# Altium PCB STM32_BOARD_v1a.PcbDoc
Units mm, origin at the board's own origin, x right, y up, seen from the top; angles counter-clockwise.
Board outline 150 x 100 mm, 2 copper layers (Top Layer, Bottom Layer), stack 1.67 mm thick; 88 components, 89 nets, 374 pads, 326 vias.
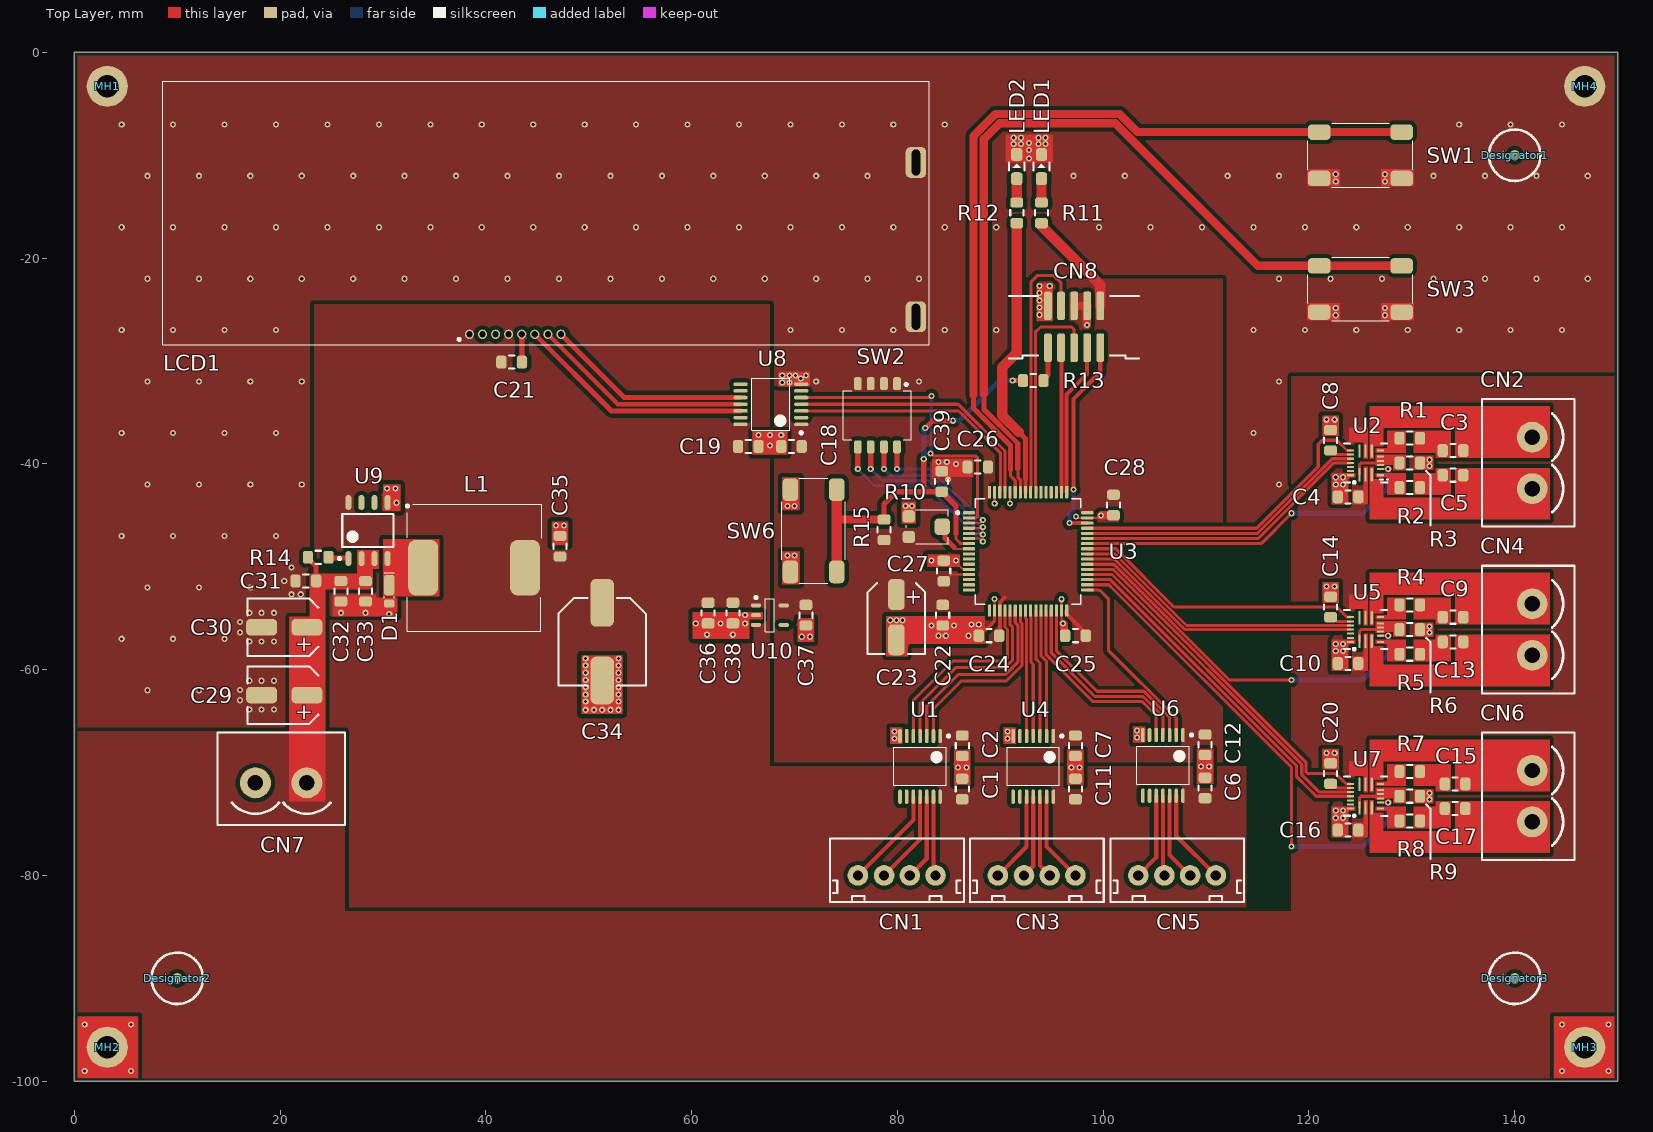
[diagram p0: Top Layer view]
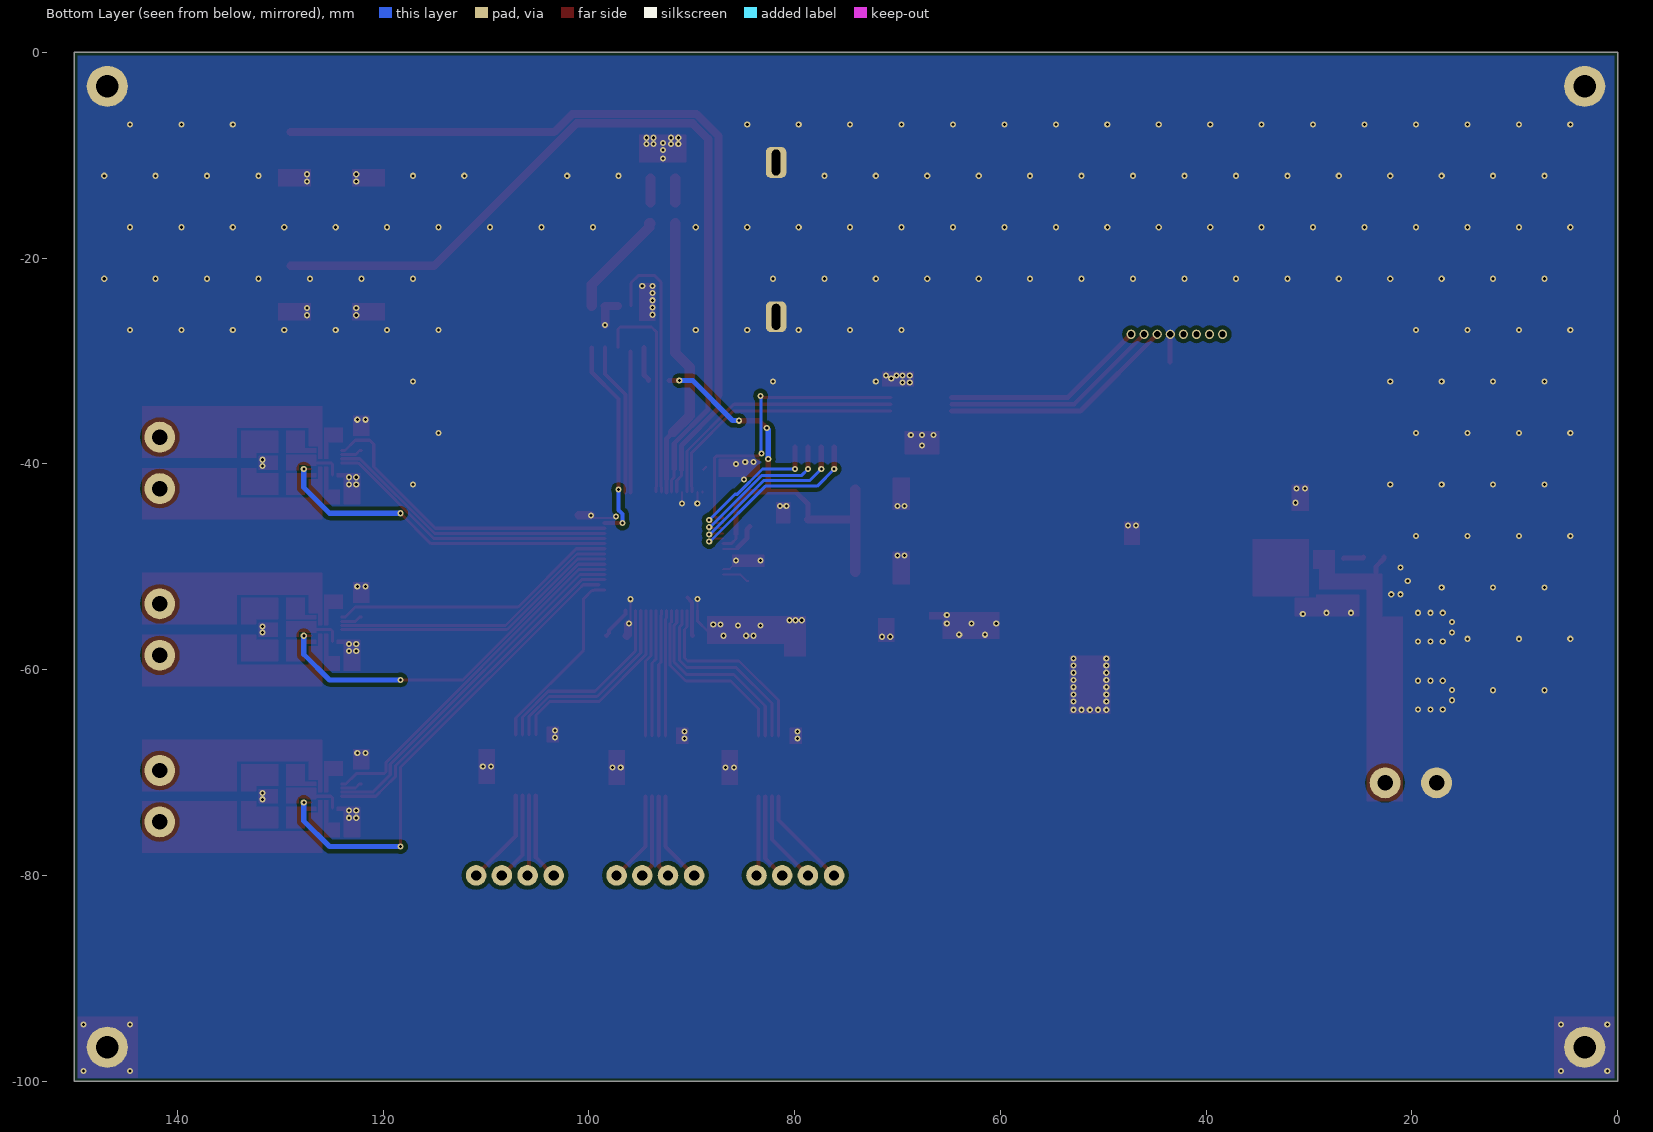
[diagram p1: Bottom Layer view, seen from below]
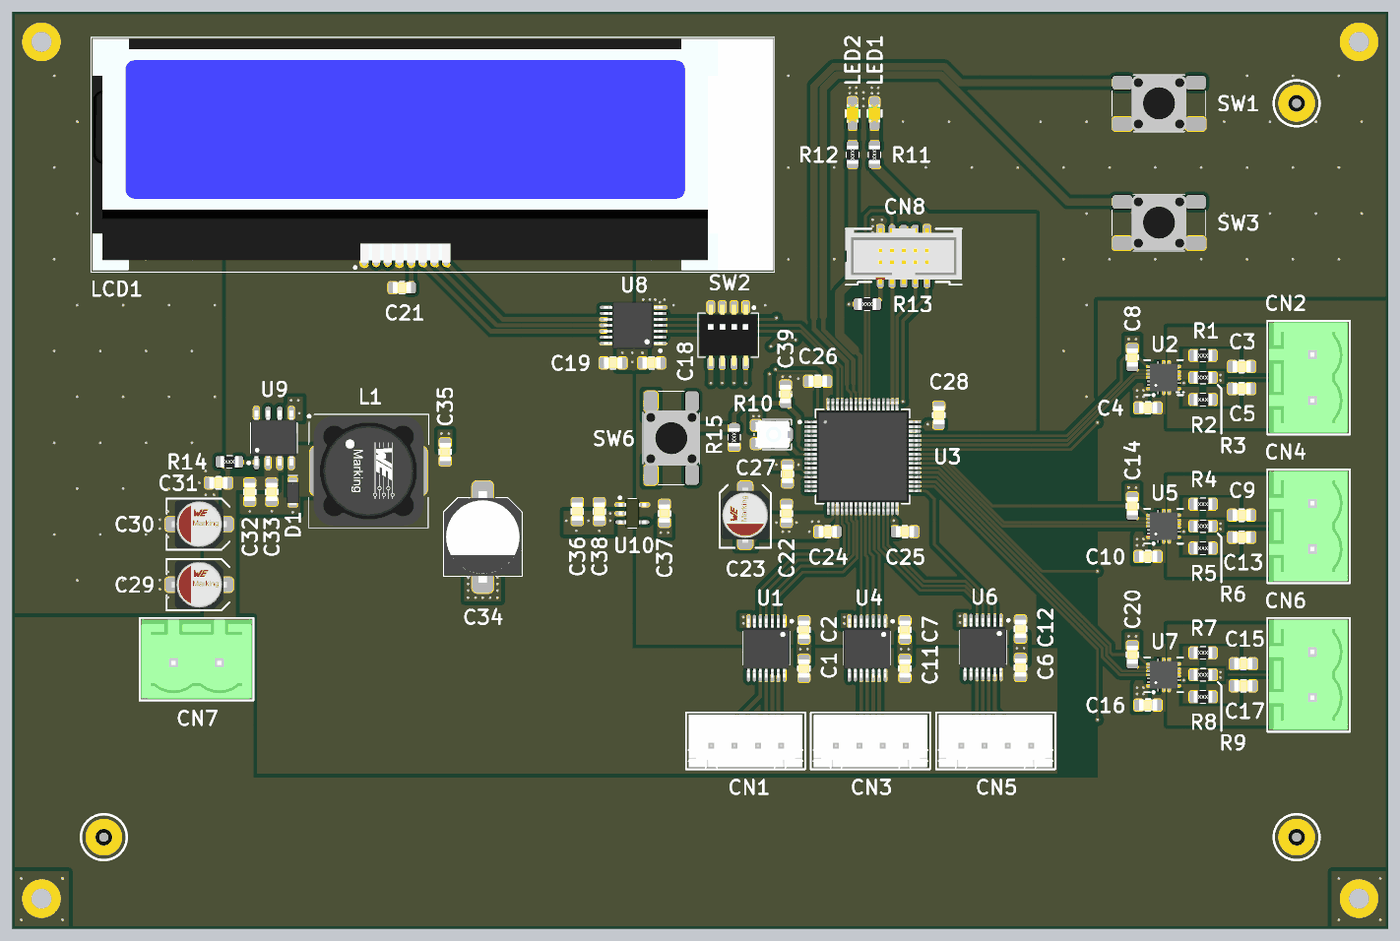
[diagram p2: 3D render of the assembled board from above, using the file's embedded part models]

## Layer stack, top to bottom
Top Solder: solder mask 0.0102, Solder Resist, Dk 3.5
Top Layer: signal copper 0.035
Dielectric 1: dielectric 1.6, FR-4, Dk 4.8
Bottom Layer: signal copper 0.035
Bottom Solder: solder mask 0.0102, Solder Resist, Dk 3.5

## Board outline
0,-100 0,0 150,0 150,-100

## Design rules (kind name [scope] priority, off if disabled: settings)
BoardOutlineClearance [All] p1: gap=0.3 ignorepadtopadclearanceinfootprint=FALSE
Clearance Clearance_poly [All vs InPolygon] p1: gap=0.4 ignorepadtopadclearanceinfootprint=TRUE
Clearance [All] p2: gap=0.1 ignorepadtopadclearanceinfootprint=TRUE
HoleSize [All] p1: absolutevalues=TRUE maxlimit=2.54 minlimit=0.3 maxpercent=80.000 minpercent=20.000
MinimumAnnularRing [All] p1: minimumring=0.15
PlaneClearance [All] p1: clearance=0.5
PlaneConnect [All] p1: planeconnectstyle=Direct reliefexpansion=0.508 reliefentries=4 reliefconductorwidth=0.254 reliefairgap=0.254
PolygonConnect [All] p1: connectstyle=Direct reliefconductorwidth=0.254 reliefentries=4 polygonreliefangle="90 Angle" airgapwidth=0.254
RoutingVias [All] p1: holewidth=0.3 width=0.6 viastyle="Through Hole" minholewidth=0.3 minwidth=0.6 maxholewidth=0.3 maxwidth=0.6
SolderMaskExpansion [All] p1: expansion=0.102 istentingtop=FALSE
Width [All] p1: maxlimit=5 minlimit=0.2 preferedwidth=0.5
27 further rules are at their usual default settings.

## Classes and differential pairs
component class STM32_BOARD_v1a_powerSupply: C22 C23 C24 C25 C26 C27 C28 C29 C30 C31 C32 C33 C34 C35 C36 C37 C38 CN7 D1 L1 L? MH1 MH2 MH3 MH4 R14 U9 U10
component class STM32_BOARD_v1a_main: C1 C2 C3 C4 C5 C6 C7 C8 C9 C10 C11 C12 C13 C14 C15 C16 C17 C18 C19 C20 C21 C39 CN1 CN2 CN3 CN4 CN5 CN6 CN8 L? LCD1 LED1 LED2 R1 R2 R3 R4 R5 R6 R7 R8 R9 R10 R11 R12 R13 R15 SW1 SW2 SW3 SW6 U1 U2 U3 U4 U5 U6 U7 U8

## Components (designator, comment, footprint, x,y, rotation, side; value= is the part's Value field where it differs from the comment)
C1 "100n" CAP_SMD 86.3,-71.6 r270 top
C2 "100n" CAP_SMD 86.3,-67.4 r90 top
C3 "10n" CAP_SMD 134,-38.7 r0 top
C4 "100n" CAP_SMD 123.8,-43.2 r0 top
C5 "10n" CAP_SMD 134,-41.1 r0 top
C6 "100n" CAP_SMD 109.9,-71.5 r270 top
C7 "100n" CAP_SMD 97.3,-67.4 r90 top
C8 "100n" CAP_SMD 122.1,-37.7 r270 top
C9 "10n" CAP_SMD 134,-54.9 r0 top
C10 "100n" CAP_SMD 123.8,-59.4 r0 top
C11 "100n" CAP_SMD 97.3,-71.6 r270 top
C12 "100n" CAP_SMD 109.9,-67.3 r90 top
C13 "10n" CAP_SMD 134,-57.3 r0 top
C14 "100n" CAP_SMD 122.1,-53.9 r270 top
C15 "10n" CAP_SMD 134.2,-71.1 r0 top
C16 "100n" CAP_SMD 123.8,-75.6 r0 top
C17 "10n" CAP_SMD 134.2,-73.5 r0 top
C18 "100n" CAP_SMD 69.7,-38.3 r0 top
C19 "100n" CAP_SMD 65.5,-38.3 r180 top
C20 "100n" CAP_SMD 122.1,-70.1 r270 top
C21 "100n" CAP_SMD 42.5,-30.1 r180 top
C22 "1u" CAP_SMD 84.4,-54.7 r90 top
C23 "4u7" 865230642008 79.9,-54.9 r270 top
C24 "100n" CAP_SMD 88.9,-56.7 r0 top
C25 "100n" CAP_SMD 97.3,-56.7 r0 top
C26 "100n" CAP_SMD 87.8,-40.3 r0 top
C27 "100n" CAP_SMD 84.5,-50.4 r270 top
C28 "100n" CAP_SMD 101,-44 r90 top
C29 "4u7" 865230642008 20.4,-62.475 r180 top
C30 "4u7" 865230642008 20.4,-55.875 r180 top
C31 "1u" CAP_SMD 22.5,-51.375 r0 top
C32 "100n" CAP_SMD 25.9,-52.375 r90 top
C33 "100n" CAP_SMD 28.3,-52.375 r90 top
C34 "330u" CAPAE10083X105M 51.3,-57.275 r270 top
C35 "100n" CAP_SMD 47.2,-48 r270 top
C36 "1u" CAP_SMD 61.6,-54.5 r90 top
C37 "100n" CAP_SMD 71.1,-54.7 r90 top
C38 "100n" CAP_SMD 64,-54.5 r90 top
C39 "100n" CAP_SMD 84.3,-41.7 r270 top
CN1 "JST XH 4" JST_XH_4-PIN 79.95,-80 r0 top
CN2 "PHOENIX_CONTACT_2x1_" 1755516 141.7,-39.9 r270 top
CN3 "JST XH 4" JST_XH_4-PIN 93.55,-80 r0 top
CN4 "PHOENIX_CONTACT_2x1_" 1755516 141.7,-56.1 r270 top
CN5 "JST XH 4" JST_XH_4-PIN 107.2,-80 r0 top
CN6 "PHOENIX_CONTACT_2x1_" 1755516 141.7,-72.3 r270 top
CN7 "PHOENIX_CONTACT_2x1_" 1755516 20.1,-71 r180 top
CN8 "SHF-105-01-L-D-SM" SHF-105-01-L-D-SM 97.17,-26.67 r270 top
D1 "SSS13HE" SOD-323HE 30.6,-52.675 r270 top
Designator1 "Comment" fid-2mm 140,-10 r0 top
Designator2 "Comment" fid-2mm 10,-90 r0 top
Designator3 "Comment" fid-2mm 140,-90 r0 top
L1 "150u" 744770215 38.85,-50.075 r270 top
LCD1 "MCCOG21605C6W-BNMLWI" MCCOG21605C6W-BNMLWI 38.4,-27.4 r0 top
LED1 "LED_SMD_GREEN" LED_0805_GREEN 94,-11.1 r90 top
LED2 "LED_SMD_GREEN" LED_0805_GREEN 91.6,-11.1 r90 top
MH1 "Mounting hole, non-plated, 2.2mm" MH-2mm2 3.2,-3.3 r0 top
MH2 "Mounting hole, non-plated, 2.2mm" MH-2mm2 3.2,-96.7 r0 top
MH3 "Mounting hole, non-plated, 2.2mm" MH-2mm2 146.8,-96.7 r0 top
MH4 "Mounting hole, non-plated, 2.2mm" MH-2mm2 146.8,-3.3 r0 top
R1 "100R" RES_0805 129.8,-37.5 r0 top
R2 "100R" RES_0805 129.8,-42.3 r0 top
R3 "200R" RES_0805 129.8,-39.9 r180 top
R4 "100R" RES_0805 129.8,-53.7 r0 top
R5 "100R" RES_0805 129.8,-58.5 r0 top
R6 "200R" RES_0805 129.8,-56.1 r180 top
R7 "100R" RES_0805 129.8,-69.9 r0 top
R8 "100R" RES_0805 129.8,-74.7 r0 top
R9 "200R" RES_0805 129.8,-72.3 r180 top
R10 "TC33X-2-502E" TC33X-2 82.9,-46.1 r270 top value=5k
R11 "200R" RES_0805 94,-15.6 r270 top
R12 "200R" RES_0805 91.6,-15.6 r270 top
R13 "0R" RES_0805 93.2,-31.9 r180 top
R14 "220R" RES_0805 23.7,-49.075 r0 top
R15 "10k" RES_0805 78.7,-46.4 r270 top
SW1 "PTS645SM43SMTR92LFS" Pushbutton_6x6mm 125,-10 r180 top
SW2 "A6H-4101" A6H-4101 78.053,-35.275 r270 top
SW3 "PTS645SM43SMTR92LFS" Pushbutton_6x6mm 125,-23 r180 top
SW6 "PTS645SM43SMTR92LFS" Pushbutton_6x6mm 71.85,-46.5 r270 top
U1 "Mfr Part Num." TSOP65P640X120-14N 82.2,-69.4 r270 top
U2 "MP6619GQ-P" MP6619GQ-P 125.5,-39.9 r90 top
U3 "32-bit Microcontroller" LQFP64_10x10mm 92.7,-48.5 r0 top
U4 "Mfr Part Num." TSOP65P640X120-14N 93.2,-69.4 r270 top
U5 "MP6619GQ-P" MP6619GQ-P 125.5,-56.1 r90 top
U6 "Mfr Part Num." TSOP65P640X120-14N 105.8,-69.3 r270 top
U7 "MP6619GQ-P" MP6619GQ-P 125.5,-72.3 r90 top
U8 "Mfr Part Num." TSOP65P640X120-14N 67.7,-34.2 r180 top
U9 "LT1107" SOIC127P600X175-8N 28.535,-46.475 r90 top
U10 "NCP164C" NCP164C_TSOP-5 67.6,-54.7 r0 top

## Footprints (in the part's own frame and the unit in brackets; to place one, negate y for a bottom-side part, rotate by r counter-clockwise, add the part's x,y. Pads: shape width x height; smd on the part's side, far side on the other; paste and mask are expansions set on the pad)
1755516 [mm] "Pin header, straight, Straight, 5mm Pitch, 2 Poles, Phoenix Contact"
  round 3 hole 1.5: 1(-2.5,0) 2(2.5,0)
  silkscreen extent -6.2,-4.9 6.2,4.1, body extent -6,-4.72 6,3.88, height 12
744770215 [mm]
  rrect50% 5.4x2.9 smd: 1(0,-4.95) 2(0,4.95)
  silkscreen extent -6.17,-6.58 6.2,6.58, body extent -6,-6 6,6, height 7.26
865230642008 [mm] "SMD Aluminium Electrolytic Capacitor, Radial Can - SMD, 4.7 µF, 50 V, 5000 hours @ 105°C, Polar"
  rrect50% 3x1.6 smd: 1(-2.2,0) 2(2.2,0)
  silkscreen extent -3.3,-2.79 3.56,2.79, body extent -3,-2.65 3,2.65, height 5.35
A6H-4101 [mm]
  rrect50% 1.25x0.76 smd paste+0 mask+0.1: 1(-3.075,1.905) 2(-3.075,0.635) 3(-3.075,-0.653) 4(-3.075,-1.905) 5(3.075,-1.905) 6(3.075,-0.653) 7(3.075,0.635) 8(3.075,1.905)
  silkscreen extent -3.1,-3.3 2.4,3.3, body extent -3.35,-3.16 3.35,3.15, height 1.55
CAP_SMD [mm] "MLCC Capacitor, 0508 Case Size"
  rrect50% 1x1.25 smd: 1(-1,0)
  rrect50% 1x1.25 smd paste+0: 2(1,0)
  silkscreen extent -0.25,-0.64 0.25,0.64, body extent -1,-0.62 1,0.62, height 0.6
CAPAE10083X105M [mm] "Aluminum Electrolytic Capacitor, Body 8.30x8.30x10.50mm, IPC Low Density"
  rrect50% 4.65x2.3 smd: 1(-3.775,0) 2(3.775,0)
  silkscreen extent -4.25,-4.25 4.25,4.25, body extent -5,-4.25 5,4.25, height 10.5
fid-2mm [mm]
  round 1 smd mask+1.5: 0(0,0)
  silkscreen extent -2.5,-2.5 2.5,2.5
JST_XH_4-PIN [mm] "JST XH 4 pin connector"
  round 2 hole 1: 1(3.75,0) 2(1.25,0) 3(-1.25,0) 4(-3.79,0)
  silkscreen extent -6.5,-2.6 6.5,3.6, body extent -6.2,-2.37 6.2,3.38, height 7
LED_0805_GREEN [mm] "Footprint for 0805 Case Size LED"
  rrect50% 1.25x1.1 smd: 1(-1.175,0) 2(1.175,0)
  silkscreen extent -0.38,-0.76 0.38,0.76, body extent -1,-0.62 1.01,0.63, height 0.8
LQFP64_10x10mm [mm] "10x10 mm"
  rrect50% 1.194x0.305 smd paste+0 mask+0.05: 1(-5.75,3.75) 2(-5.75,3.25) 3(-5.75,2.75) 4(-5.75,2.25) 5(-5.75,1.75) 6(-5.75,1.25) 7(-5.75,0.75) 8(-5.75,0.25) 9(-5.75,-0.25) 10(-5.75,-0.75) 11(-5.75,-1.25) 12(-5.75,-1.75) 13(-5.75,-2.25) 14(-5.75,-2.75) 15(-5.75,-3.25) 16(-5.75,-3.75) 33(5.75,-3.75) 34(5.75,-3.25) 35(5.75,-2.75) 36(5.75,-2.25) 37(5.75,-1.75) 38(5.75,-1.25) 39(5.75,-0.75) 40(5.75,-0.25) 41(5.75,0.25) 42(5.75,0.75) 43(5.75,1.25) 44(5.75,1.75) 45(5.75,2.25) 46(5.75,2.75) 47(5.75,3.25) 48(5.75,3.75)
  rrect50% 0.305x1.194 smd paste+0 mask+0.05: 17(-3.75,-5.75) 18(-3.25,-5.75) 19(-2.75,-5.75) 20(-2.25,-5.75) 21(-1.75,-5.75) 22(-1.25,-5.75) 23(-0.75,-5.75) 24(-0.25,-5.75) 25(0.25,-5.75) 26(0.75,-5.75) 27(1.25,-5.75) 28(1.75,-5.75) 29(2.25,-5.75) 30(2.75,-5.75) 31(3.25,-5.75) 32(3.75,-5.75) 49(3.75,5.75) 50(3.25,5.75) 51(2.75,5.75) 52(2.25,5.75) 53(1.75,5.75) 54(1.25,5.75) 55(0.75,5.75) 56(0.25,5.75) 57(-0.25,5.75) 58(-0.75,5.75) 59(-1.25,5.75) 60(-1.75,5.75) 61(-2.25,5.75) 62(-2.75,5.75) 63(-3.25,5.75) 64(-3.75,5.75)
  silkscreen extent -6.95,-5.13 5.13,5.13, body extent -6,-6 6,6, height 1.6
MCCOG21605C6W-BNMLWI [mm]
  round 0.9 hole 0.6: 1(0,0) 2(1.27,0) 3(2.54,0) 4(3.81,0) 5(5.08,0) 6(6.35,0) 7(7.62,0) 8(8.89,0)
  rrect50% 2x3 hole 0.8 slot 2.5 at 90 deg: G1(43.4,1.7) G2(43.4,16.7)
  silkscreen extent -29.8,-1 44.7,24.6, body extent -29.66,-0.8 44.56,24.41, height 6.3
MH-2mm2 [mm] "2.2mm Mounting hole, non plated"
  round 4 hole 2.2 unplated: 1(0,0)
MP6619GQ-P [mm] "19-pin, QFN-19_3x3mm"
  rrect50% 1.3x0.2 smd: 1(-1.15,0.6) 2(-1.15,0) 3(-1.15,-0.6) 10(1.15,-0.6) 11(1.15,0) 12(1.15,0.6)
  rrect50% 0.2x0.7 smd: 4(-1.2,-1.45) 5(-0.6,-1.45) 6(-0.2,-1.45) 7(0.2,-1.45) 8(0.6,-1.45) 9(1.2,-1.45) 13(1.2,1.45) 14(0.8,1.45) 15(0.4,1.45) 16(0,1.45) 17(-0.4,1.45) 18(-0.8,1.45) 19(-1.2,1.45)
  silkscreen extent -2,-2.11 1.9,2.1, body extent -1.5,-1.5 1.5,1.5, height 0.92
NCP164C_TSOP-5 [mm] "TSOP, 6-Leads, Body 3.00x1.50mm, Pitch 0.95mm, IPC Medium Density"
  oval 1x0.4 smd: 1(-1.35,0.95) 2(-1.35,0) 3(-1.35,-0.95) 4(1.35,-0.95) 5(1.35,0.95)
  silkscreen extent -1.47,-1.6 0.45,1.82, body extent -1.5,-1.55 1.5,1.55, height 1.1
Pushbutton_6x6mm [mm] "Tactile Switch"
  rrect50% 2.2x1.5 smd: 1(-4,2.25) 2(4,2.25) 3(-4,-2.25) 4(4,-2.25)
  silkscreen extent -5.1,-3.1 5.1,3.1, body extent -5,-3 5,3
RES_0805 [mm] "SMD Resistor, 0805 Case Size"
  rrect50% 1x1.25 smd: 1(-1,0)
  rrect50% 1x1.25 smd paste+0: 2(1,0)
  silkscreen extent -0.25,-0.64 0.25,0.64, body extent -1,-0.62 1,0.62, height 0.5
SHF-105-01-L-D-SM [mm]
  rrect50% 2.79x0.74 smd: 1(-2.03,2.54) 2(2.03,2.54) 3(-2.03,1.27) 4(2.03,1.27) 5(-2.03,0) 6(2.03,0) 7(-2.03,-1.27) 8(2.03,-1.27) 9(-2.03,-2.54) 10(2.03,-2.54)
  silkscreen extent -3,-6.3 3.1,6.3, body extent -3.05,-6.35 3.05,6.35, height 5.33
SOD-323HE [mm]
  rrect50% 2x1 smd: 1(-0.9,0)
  rrect50% 0.8x1 smd: 2(0.9,0)
  silkscreen extent -2.1,-0.5 0.4,0.5, body extent -1.6,-0.7 1.1,0.7, height 0.76
SOIC127P600X175-8N [mm] "SOIC, 8-Leads, Body 4.90x3.90mm, Pitch 1.27mm, IPC Medium Density"
  oval 1.45x0.6 smd: 1(-2.725,1.905) 2(-2.725,0.635) 3(-2.725,-0.635) 4(-2.725,-1.905) 5(2.725,-1.905) 6(2.725,-0.635) 7(2.725,0.635) 8(2.725,1.905)
  silkscreen extent -2.85,-2.5 1.6,2.88, body extent -3,-2.5 3,2.5, height 1.75
TC33X-2 [mm]
  rrect50% 1.2x1.2 smd: 1(-1,-1.8) 3(1,-1.8)
  rrect50% 1.6x1.5 smd: 2(0,1.45)
  silkscreen extent -1.65,-2.03 1.65,2.03, body extent -1.5,-1.9 1.5,1.9, height 1.21
TSOP65P640X120-14N [mm] "TSOP, 14-Leads, Body 5.00x4.40mm, Pitch 0.65mm, IPC Medium Density"
  oval 1.4x0.35 smd mask+0.07: 1(-2.95,1.95) 2(-2.95,1.3) 3(-2.95,0.65) 4(-2.95,0) 5(-2.95,-0.65) 6(-2.95,-1.3) 7(-2.95,-1.95) 8(2.95,-1.95) 9(2.95,-1.3) 10(2.95,-0.65) 11(2.95,0) 12(2.95,0.65) 13(2.95,1.3) 14(2.95,1.95)
  silkscreen extent -3.07,-2.55 1.85,2.9, body extent -3.2,-2.55 3.2,2.55, height 1.2

## Part data
C1 C2 C3 C4 C5 C6 C7 C8 C9 C10 C11 C12 C13 C14 C15 C16 C17 C18 C19 C20 C21 C22 C24 C25 C26 C27 C28 C31 C32 C33 C35 C36 C37 C38 C39: library part C, Temperature Range=-55~125°C
  C1 C2 C4 C6 C7 C8 C10 C11 C12 C14 C16 C18 C19 C20 C21 C24 C25 C26 C27 C28 C32 C33 C35 C37 C38 C39: Capacitance=100n
  C3 C5 C9 C13 C15 C17: Capacitance=10n
  C22 C31 C36: Capacitance=1u
C23 C29 C30: library part CAP_POLAR_4u7_50V, "SMD Aluminium Electrolytic Capacitor, Radial Can - SMD, 4.7 µF, 50 V, 5000 hours @ 105°C, Polar", Manufacturer="Wurth Elektrinik", Mfr Part Num=865230642008, Voltage=50V
C34: library part CAP_POLAR_330u_50V, "SMD Aluminium Electrolytic Capacitor, Radial Can - SMD, 4.7 µF, 50 V, 5000 hours @ 105°C, Polar", Manufacturer=Kemet, Mfr Part Num=EDK337M010A9MAA, Voltage=10V
CN1 CN3 CN5: library part JST_XH_4_PIN, "JST XH 4 Pin Connector", Manufacturer=JASO, Mfr Part Num.="JST XH 4"
CN2 CN4 CN6 CN7: "Pin header, straight, Straight, 5mm Pitch, 2 Poles, Phoenix Contact", Manufacturer="Phoenix Contact", Mfr Part Num.=1755516
CN8: "Pin Header, Vertical, Wire-to-Board, 1.27 mm, 2 Rows, 10 Contacts, Surface Mount, SHF", Manufacturer=Samtec, Mfr. Part Number=SHF-105-01-L-D-SM
D1: library part SS13HE, "Surface Mount Schottky Barrier Rectifier.", Forward Current=1A, Forward Surge Current Max=25A, Forward Voltage Max.=550mV, Manufacturer="ON Semiconductor", Operating Temperature=150°C, Mfr Part Num.=SSS13HE
L1: library part L_105uH_744770215, "Power Inductor (SMD), 150 µH, 1.8 A, Shielded, 1.8 A, WE-PD, 12mm x 12mm x 8mm", DC Resistance Max=0.28R, Manufacturer="Wurth Elektronik", Mfr Part Num.=744770215, RMS Current=1.8A, Inductance=150u
LCD1: "Alphanumeric LCD, 16 x 2, White on Blue, 3V to 5V, I2C, English, Japanese, Transmissive", Manufacturer=MIDAS, Mfr Part Num.=MCCOG21605C6W-BNMLWI
MH1 MH2 MH3 MH4: library part MH-2mm2
R1 R2 R3 R4 R5 R6 R7 R8 R9 R11 R12 R13 R14 R15: library part R
  R1 R2 R4 R5 R7 R8: Resistance=100R
  R3 R6 R9 R11 R12: Resistance=200R
  R13: Resistance=0R
  R14: Resistance=220R
  R15: Resistance=10k
R10: "Trimpot, Single Turn, Cermet, Top Adjust, 5 kohm, Surface Mount, 1 Turns", Manufacturer=Bourns, Power Rating=100mW, Mfr Part Num.=TC33X-2-502E
SW1 SW3 SW6: "Tactile Switch, PT645, Top Actuated, Surface Mount, Round Button, 160 gf, 50mA at 12VDC", Current=50mA, Manufacturer="C&K Components", Voltage=12V, Mfr Part Num.=PTS645SM43SMTR92LFS
SW2: "DIP / SIP Switch, 4 Circuits, Slide, Surface Mount, SPST, 24 VDC, 25 mA", Current=25mA, Manufacturer=Omron, Voltage=24V, Mfr Part Num.=A6H-4101
U1 U4 U6 U8: library part TXS0104E, "Voltage Level Translator, 4 Input, 50 mA, 4.6 ns, 1.65 V to 5.5 V, TSSOP-14", Manufacturer="Texas Instruments", Mfr Part Num=TXS0104EPWR, Output Current=50mA, Supply Voltage=1.65V~5.5V
U2 U5 U7: "H-Bridge Motor driver", Manufacturer=MPS, Output Current=5A, Supply Voltage=5.4V~28V, Mfr Part Num=MP6619GQ-P
U3: library part STM32L476RGT3, "STM32 Arm-based 32-bit Microcontroller", Manufacturer=STMicroelectronics, Supply Voltage=1.7V~3.6V, Temperature Range=-40~125°C, CPU Speed=80MHz, Mfr Part Num=STM32L476RGT3, Program Memory Size=1MB, RAM Memory Size=128kB
U9: "Micropower / DC/DC Converter / Adjustable and Fixed 5V, 12V", Manufacturer="Linear technology", Mfr Part Num.=LT1107
U10: "LDO Regulator, 300mA, / Low Dropout Voltage, Ultra Low Noise, High PSRR with Power Good", Current=300mA, Input Voltage=1.6V~5V, Manufacturer="On Semiconductor", Mfr Part Num.=NCP164CSN330T1G, Output Voltage=3.3V

## Via types
v1: diameter 0.6, hole 0.3, Top Layer to Bottom Layer, tented both sides, 326 vias

## Nets (pads, with @x,y where several pads share a name; then routed paths per layer and width w, separated by ;. In a path a pad name is that pad's centre, name@x,y a point inside that pad or via, vN(x,y) a via of type N, cw(c..) or ccw(c..) an arc to the next point about the centre after c; other vN are vias at no path point)
+3V3: C2.2 C7.2 C12.2 C18.2 C22.2 C23.1 C24.2 C25.2 C26.2 C27.2 C28.2 C37.2 CN8.1 R10.3 R11.2 R15.2 U1.1 U3.13 U3.19 U3.32 U3.48 U3.64 U4.1 U6.1 U8.1 U10.5 | length 20.7
  Top Layer w0.2: C27.2 84.625,-51.4 85.275,-50.75 U3.13
  Top Layer w0.3: C26.2@88.6,-40.3 C26.2@88.848,-40.548 ; U3.64@88.948,-42.748 U3.64
  Top Layer w0.4: C24.2 89.95,-56.65 89.95,-53.45 90.4,-53 ; U3.32 96.45,-54.599 98.031,-56.18 98.031,-56.431 C25.2
  Top Layer w1: R11.2 94.125,-16.6 94.125,-17.001 99.124,-22 99.71,-22.586 CN8.1
+5V: C1.2 C6.2 C11.2 C19.2 C21.2 C34.1 C35.2 C36.2 C38.2 L1.2 LCD1.1 LCD1.4 U1.14 U4.14 U6.14 U8.14 U9.8 U10.1 U10.3
+24V: C4.2 C10.2 C16.2 C29.1 C30.1 C31.2 C32.2 C33.2 CN7.1 R14.1 U2.2 U2.11 U5.2 U5.11 U7.2 U7.11 U9.2 U9.3 | length 2.6
  Top Layer w0.5: R14.1 22.7,-49.2 23.5,-50 C31.2
A0: R10.2 U3.8 | length 4
  Top Layer w0.2: 85.5,-48.1 85.65,-48.25 U3.8
  Top Layer w0.5: R10.2 84.62,-46.37 84.62,-47.22 85.5,-48.1
Dip1: SW2.8 U3.3 | length 14
  Top Layer w0.2: U3.3 87.993,-45.75 88.293,-45.45 v1(88.3,-45.45)
  Top Layer w0.5: v1(79.958,-40.5) SW2.8
  Bottom Layer w0.3: v1(79.958,-40.5) 83.122,-40.5 85.568,-42.946 85.796,-42.946 v1(88.3,-45.45)
Dip2: SW2.7 U3.4 | length 15.5
  Top Layer w0.2: U3.4 88.2,-46.25 v1(88.3,-46.15)
  Top Layer w0.5: v1(78.688,-40.5) SW2.7
  Bottom Layer w0.3: v1(78.688,-40.5) 79.299,-41.111 83.168,-41.111 85.659,-43.602 85.674,-43.602 88.222,-46.15 v1(88.3,-46.15)
Dip3: SW2.6 U3.5 | length 17.1
  Top Layer w0.2: U3.5 88.2,-46.75 v1(88.3,-46.85)
  Top Layer w0.5: v1(77.4,-40.5) SW2.6
  Bottom Layer w0.3: v1(77.4,-40.5) 78.5,-41.6 82.972,-41.6 88.222,-46.85 v1(88.3,-46.85)
Dip4: SW2.5 U3.6 | length 18.7
  Top Layer w0.2: U3.6 87.993,-47.25 88.293,-47.55 v1(88.3,-47.55)
  Top Layer w0.5: v1(76.148,-40.5) SW2.5
  Bottom Layer w0.3: v1(76.148,-40.5) 77.809,-42.161 82.833,-42.161 88.222,-47.55 v1(88.3,-47.55)
ENC1_A: U1.2 U3.23 | length 18.4
  Top Layer w0.3: U1.2 83.5,-63.8 86.2,-61.1 90.571,-61.1 92.1,-59.571 92.1,-55.517 91.95,-55.367 U3.23
ENC1_B: U1.4 U3.21 | length 18.8
  Top Layer w0.3: U1.4 82.2,-63.262 85.662,-59.8 90.457,-59.8 91.2,-59.057 91.2,-55.89 90.95,-55.64 U3.21
ENC1_~A: U1.3 U3.22 | length 18.7
  Top Layer w0.3: U1.3 82.85,-63.531 85.931,-60.45 90.514,-60.45 91.7,-59.264 91.7,-55.683 91.45,-55.433 U3.22
ENC1_~B: U1.5 U3.20 | length 19
  Top Layer w0.3: U1.5 81.55,-62.992 85.392,-59.15 90.4,-59.15 90.7,-58.85 90.7,-56.097 90.45,-55.847 U3.20
ENC2_A: U3.27 U4.2 | length 12.4
  Top Layer w0.3: U3.27 93.95,-58.65 94.5,-59.2 U4.2
ENC2_B: U3.25 U4.4 | length 12.3
  Top Layer w0.3: U3.25 92.95,-54.694 93,-54.744 93,-59.3 93.2,-59.5 U4.4
ENC2_~A: U3.26 U4.3 | length 12.4
  Top Layer w0.3: U3.26 93.45,-58.95 93.85,-59.35 U4.3
ENC2_~B: U3.24 U4.5 | length 12.2
  Top Layer w0.3: U3.24 92.45,-54.997 92.55,-55.097 U4.5
ENC3_A: U3.33 U6.2 | length 18.4
  Top Layer w0.3: U3.33 98.894,-52.25 98.897,-52.252 99.497,-52.252 99.544,-52.3 99.7,-52.3 100.5,-53.1 100.5,-58.103 107.1,-64.703 U6.2
ENC3_B: U3.29 U6.4 | length 19.3
  Top Layer w0.3: U3.29 94.95,-58.357 99.193,-62.6 103.866,-62.6 105.8,-64.534 U6.4
ENC3_~A: U3.30 U6.3 | length 19.3
  Top Layer w0.3: U3.30 95.45,-58.15 99.4,-62.1 103.931,-62.1 106.45,-64.619 U6.3
ENC3_~B: U3.28 U6.5 | length 19.4
  Top Layer w0.3: U3.28 94.45,-58.564 98.986,-63.1 103.8,-63.1 105.15,-64.45 U6.5
GND: C1.1 C2.1 C4.1 C6.1 C7.1 C8.1 C10.1 C11.1 C12.1 C14.1 C16.1 C18.1 C19.1 C20.1 C21.1 C22.1 C23.2 C24.1 C25.1 C26.1 C27.1 C28.1 C29.2 C30.2 C31.1 C32.1 C33.1 C34.2 C35.1 C36.1 C37.1 C38.1 C39.1 CN7.2 CN8.3 CN8.5 CN8.9 D1.2 LCD1.5 LCD1.G1 LCD1.G2 LED1.2 LED2.2 MH1.1 MH2.1 MH3.1 MH4.1 R3.1 R6.1 R9.1 R10.1 SW1.1 SW1.2 SW2.1 SW2.2 SW2.3 SW2.4 SW3.1 SW3.2 SW6.3 SW6.4 U1.7 U2.19 U3.12 U3.18 U3.31 U3.47 U3.60 U3.63 U4.7 U5.19 U6.7 U7.19 U8.7 U9.5 U10.2 | length 22.9
  Top Layer w0.2: v1(85.7,-49.4) 85.7,-49.6 86.298,-50.198 86.898,-50.198 U3.12 ; v1(89.436,-53.141) 89.443,-53.149 89.443,-54.243 U3.18 ; v1(89.45,-43.85) U3.63 ; v1(90.95,-43.85) U3.60 ; v1(95.95,-53.15) U3.31 95.95,-55.242 96.1,-55.392 v1(96.1,-55.5) ; v1(97.348,-45.117) 97.456,-45.117 97.589,-45.25 U3.47 99.55,-45.25 v1(99.8,-45)
  Top Layer w0.3: C24.1 87.9,-56.629 88.242,-56.287 88.413,-56.287 89.452,-55.248 89.452,-54.252 U3.18
  Top Layer w0.5: LCD1.5 43.5,-27.42 C21.1 ; v1(84.9,-41.5) 84.9,-40.855 85.385,-40.37
  Top Layer w0.8: v1(96.1,-55.5) 96.2,-55.6 96.2,-56.6 C25.1 ; CN8.5 CN8.3 98.41,-24.67 v1(98.41,-26.5) ; v1(99.8,-45) C28.1
  other v1: 1,-99 5.5,-99 144.6,-99 149.1,-99 1,-94.5 5.5,-94.5 144.6,-94.5 149.1,-94.5 122.6,-74.4 123.3,-74.4 122.6,-73.7 123.3,-73.7 131.7,-72.6 131.7,-72 85.9,-69.5 86.7,-69.5 96.9,-69.5 97.7,-69.5 109.5,-69.4 110.3,-69.4 121.7,-68.1 122.5,-68.1 79.7,-66.7 90.7,-66.7 103.3,-66.6 79.7,-66 90.7,-66 103.3,-65.9 49.7,-63.9 50.5,-63.9 51.3,-63.9 52.1,-63.9 52.9,-63.9 17,-63.875 18.2,-63.875 19.4,-63.875 49.7,-63.1 52.9,-63.1 16.1,-62.975 49.7,-62.4 52.9,-62.4 7.1,-62 12.1,-62 16.1,-61.975 49.7,-61.7 52.9,-61.7 17,-61.075 18.2,-61.075 19.4,-61.075 49.7,-61 52.9,-61 49.7,-60.3 52.9,-60.3 49.7,-59.6 52.9,-59.6 49.7,-58.9 52.9,-58.9 122.6,-58.2 123.3,-58.2 122.6,-57.5 123.3,-57.5 17,-57.275 18.2,-57.275 19.4,-57.275 4.6,-57 9.6,-57 14.6,-57 70.7,-56.8 71.5,-56.8 84,-56.7 84.7,-56.7 86.9,-56.7 61.5,-56.6 64,-56.6 131.7,-56.4 16.1,-56.375 131.7,-55.8 83.3,-55.7 85.5,-55.7 87.2,-55.6 87.9,-55.6 60.4,-55.5 62.8,-55.5 65.2,-55.5 16.1,-55.375 79.3,-55.2 79.9,-55.2 80.5,-55.2 65.2,-54.7 30.6,-54.575 17,-54.475 18.2,-54.475 19.4,-54.475 25.9,-54.475 28.3,-54.475 21.1,-52.675 22,-52.675 7.1,-52 12.1,-52 17.1,-52 121.7,-51.9 122.5,-51.9 20.4,-51.375 21.1,-50.075 83.3,-49.4 69.3,-48.9 70,-48.9 4.6,-47 9.6,-47 14.6,-47 19.6,-47 46.8,-46 47.6,-46 69.3,-44.1 70,-44.1 80.8,-44.1 81.4,-44.1 31.3,-43.775 30.4,-42.375 31.2,-42.375 7.1,-42 12.1,-42 17.1,-42 22.1,-42 117.1,-42 122.6,-42 123.3,-42 122.6,-41.3 123.3,-41.3 131.7,-40.2 85.7,-40 84,-39.8 84.8,-39.8 131.7,-39.6 67.6,-38.2 66.5,-37.2 67.6,-37.2 68.7,-37.2 4.6,-37 9.6,-37 14.6,-37 19.6,-37 114.6,-37 121.7,-35.7 122.5,-35.7 68.8,-32.1 69.5,-32.1 7.1,-32 12.1,-32 17.1,-32 22.1,-32 72.1,-32 82.1,-32 117.1,-32 70.6,-31.7 68.8,-31.4 69.5,-31.4 70.1,-31.4 71.1,-31.4 4.6,-27 9.6,-27 14.6,-27 19.6,-27 69.6,-27 74.6,-27 79.6,-27 84.6,-27 89.6,-27 114.6,-27 119.6,-27 124.6,-27 129.6,-27 134.6,-27 139.6,-27 144.6,-27 122.6,-25.55 127.4,-25.55 93.8,-25.5 122.6,-24.85 127.4,-24.85 93.8,-24.8 93.8,-24.1 93.8,-23.4 93.8,-22.7 94.8,-22.7 7.1,-22 12.1,-22 17.1,-22 22.1,-22 27.1,-22 32.1,-22 37.1,-22 42.1,-22 47.1,-22 52.1,-22 57.1,-22 62.1,-22 67.1,-22 72.1,-22 77.1,-22 82.1,-22 117.1,-22 122.1,-22 127.1,-22 132.1,-22 137.1,-22 142.1,-22 147.1,-22 4.6,-17 9.6,-17 14.6,-17 19.6,-17 24.6,-17 29.6,-17 34.6,-17 39.6,-17 44.6,-17 49.6,-17 54.6,-17 59.6,-17 64.6,-17 69.6,-17 74.6,-17 79.6,-17 84.6,-17 89.6,-17 99.6,-17 104.6,-17 109.6,-17 114.6,-17 119.6,-17 124.6,-17 129.6,-17 134.6,-17 139.6,-17 144.6,-17 122.6,-12.55 127.4,-12.55 7.1,-12 12.1,-12 17.1,-12 22.1,-12 27.1,-12 32.1,-12 37.1,-12 42.1,-12 47.1,-12 52.1,-12 57.1,-12 62.1,-12 67.1,-12 72.1,-12 77.1,-12 97.1,-12 102.1,-12 112.1,-12 117.1,-12 132.1,-12 137.1,-12 142.1,-12 147.1,-12 122.6,-11.85 127.4,-11.85 92.8,-10.3 92.8,-9.5 91.3,-8.9 92,-8.9 93.7,-8.9 94.4,-8.9 92.8,-8.8 91.3,-8.3 92,-8.3 93.7,-8.3 94.4,-8.3 4.6,-7 9.6,-7 14.6,-7 19.6,-7 24.6,-7 29.6,-7 34.6,-7 39.6,-7 44.6,-7 49.6,-7 54.6,-7 59.6,-7 64.6,-7 69.6,-7 74.6,-7 79.6,-7 84.6,-7 134.6,-7 139.6,-7 144.6,-7
JTCK-SWCLK: CN8.4 U3.49 | length 14.9
  Top Layer w0.4: U3.49 96.45,-33.25 98.44,-31.26 CN8.4
JTDI: CN8.8 U3.50 | length 13.7
  Top Layer w0.4: U3.50 CN8.8@95.95,-29.1
JTDO-TRACESWO: CN8.6 U3.55 | length 21.4
  Top Layer w0.3: U3.55 93.45,-42.306 93.4,-42.256 93.4,-27.2 93.9,-26.7 96.936,-26.7 97.17,-26.934 CN8.6
JTMS-SWDIO: CN8.2 U3.46 | length 20
  Top Layer w0.4: v1(96.736,-45.75) U3.46 ; v1(97.1,-42.5) 97.1,-33.7 99.71,-31.09 CN8.2
  Bottom Layer w0.4: v1(96.736,-45.75) 96.736,-44.864 97.1,-44.5 v1(97.1,-42.5)
LCD_Rst: U3.2 U8.5 | length 29.7
  Top Layer w0.3: U8.5 83.069,-33.55 83.219,-33.4 v1(83.3,-33.4) ; v1(83.206,-39) 83.287,-39 83.498,-39.211 87.571,-39.211 87.8,-39.44 87.8,-45.072 87.624,-45.248 86.952,-45.248 U3.2
  Bottom Layer w0.3: v1(83.206,-39) 83.253,-38.953 83.253,-33.447 v1(83.3,-33.4)
LCD_SCL: U3.61 U8.4 | length 25.7
  Top Layer w0.3: U8.4 85.9,-34.2 90.45,-38.75 U3.61
LCD_SDA: U3.62 U8.3 | length 24.9
  Top Layer w0.3: U8.3 85.95,-34.85 90,-38.9 90,-42.256 89.95,-42.306 U3.62
LED2: R12.2 U3.57 | length 27.7
  Top Layer w0.4: U3.57 92.45,-41.45
  Top Layer w0.5: 91.8,-36.9 92.45,-37.55 92.45,-41.45
  Top Layer w1: R12.2 91.6,-29.2 90.2,-30.6 90.2,-35.3 91.8,-36.9
MCU_nRST: CN8.10 R13.1 | length 3.4
  Top Layer w0.5: R13.1 94.2,-31.775 94.63,-31.345 CN8.10
MCU_nRST': C39.2 R13.2 R15.1 SW6.1 SW6.2 U3.7 | length 44.6
  Top Layer w0.3: 85.7,-46.8 85.7,-47.3 86.148,-47.748 86.948,-47.748 U3.7
  Top Layer w0.5: R15.1 78.7,-43.9 79.9,-42.7 82.556,-42.7 ; v1(82.556,-39.528) 82.556,-42.7 ; v1(82.7,-36.5) 82.727,-36.5 83.427,-35.8 v1(85.4,-35.8) ; 85.7,-46.8 85.7,-44.1 84.675,-43.075 84.675,-42.95 84.425,-42.7 C39.2 82.556,-42.7 ; v1(91.2,-31.9) R13.2
  Top Layer w0.8: 74.1,-45.4 R15.1
  Top Layer w1: SW6.2 74.1,-45.4 SW6.1
  Bottom Layer w0.5: v1(82.556,-39.528) 82.556,-36.671 82.7,-36.527 v1(82.7,-36.5) ; v1(85.4,-35.8) 85.419,-35.781 86.019,-35.781 89.9,-31.9 v1(91.2,-31.9)
Motor_Driver_En1: U2.5 U3.42 | length 34.1
  Top Layer w0.2: U2.5 v1(127.7,-40.5)
  Top Layer w0.3: U3.42 115.35,-47.75 v1(118.3,-44.8)
  Bottom Layer w0.5: v1(118.3,-44.8) 125.2,-44.8 127.7,-42.3 v1(127.7,-40.5)
Motor_Driver_En2: U3.38 U5.5 | length 37.5
  Top Layer w0.2: U5.5 v1(127.7,-56.7)
  Top Layer w0.3: U3.38 101.016,-49.75 112.266,-61 v1(118.3,-61)
  Bottom Layer w0.5: v1(118.3,-61) 125.2,-61 127.7,-58.5 v1(127.7,-56.7)
Motor_Driver_En3: U3.34 U7.5 | length 47.3
  Top Layer w0.2: U7.5 v1(127.7,-72.9)
  Top Layer w0.3: U3.34@99.034,-51.748 100.548,-51.748 101,-52.2 118.3,-69.5 v1(118.3,-77.2)
  Bottom Layer w0.5: v1(118.3,-77.2) 125.2,-77.2 127.7,-74.7 v1(127.7,-72.9)
Motor_Driver_In1_1: U2.15 U3.44 | length 28.6
  Top Layer w0.3: U3.44 115,-46.75 122.25,-39.5 U2.15
Motor_Driver_In1_2: U2.16 U3.43 | length 28.6
  Top Layer w0.3: U3.43 115.066,-47.25 122.416,-39.9 U2.16
Motor_Driver_In2_1: U3.40 U5.15 | length 28.5
  Top Layer w0.3: U3.40 101.147,-48.75 108.097,-55.7 U5.15
Motor_Driver_In2_2: U3.39 U5.16 | length 28.4
  Top Layer w0.3: U3.39 101.081,-49.25 107.931,-56.1 U5.16
Motor_Driver_In3_1: U3.36 U7.15 | length 34.9
  Top Layer w0.3: U3.36 100.85,-50.75 119.3,-69.2 119.3,-70.2 121,-71.9 U7.15
Motor_Driver_In3_2: U3.35 U7.16 | length 34.9
  Top Layer w0.3: U3.35 100.686,-51.25 118.8,-69.364 118.8,-70.4 119.9,-71.5 120.7,-72.3 U7.16
Motor_Driver_nFault1: U2.13 U3.45 | length 30.8
  Top Layer w0.3: U3.45 114.934,-46.25 120.9,-40.284 120.9,-38.1 121.3,-37.7 122.7,-37.7 123.7,-38.7 U2.13
Motor_Driver_nFault2: U3.41 U5.13 | length 28.4
  Top Layer w0.3: U3.41 101.213,-48.25 106.863,-53.9 122.7,-53.9 123.7,-54.9 U5.13
Motor_Driver_nFault3: U3.37 U7.13 | length 34.8
  Top Layer w0.3: U3.37 100.95,-50.25 119.7,-69 119.7,-69.9 119.9,-70.1 122.6,-70.1 123.6,-71.1 U7.13
NetC3_1: C3.1 R1.2
NetC3_2: C3.2 CN2.1 U2.10
NetC5_1: C5.1 R2.2
NetC5_2: C5.2 CN2.2 U2.3
NetC8_2: C8.2 U2.14 | length 2.1
  Top Layer w0.3: C8.2 122.279,-38.7 122.679,-39.1 U2.14
NetC9_1: C9.1 R4.2
NetC9_2: C9.2 CN4.1 U5.10
NetC13_1: C13.1 R5.2
NetC13_2: C13.2 CN4.2 U5.3
NetC14_2: C14.2 U5.14 | length 2.1
  Top Layer w0.3: C14.2 122.279,-54.9 122.679,-55.3 U5.14
NetC15_1: C15.1 R7.2
NetC15_2: C15.2 CN6.1 U7.10
NetC17_1: C17.1 R8.2 | length 0
NetC17_2: C17.2 CN6.2 U7.3
NetC20_2: C20.2 U7.14 | length 2.1
  Top Layer w0.3: C20.2 122.279,-71.1 122.679,-71.5 U7.14
NetCN1_1: CN1.1 U1.13 | length 7.7
  Top Layer w0.4: U1.13 83.5,-79.8 CN1.1
NetCN1_2: CN1.2 U1.12 | length 8.3
  Top Layer w0.4: CN1.2 82.85,-78.35 U1.12
NetCN1_3: CN1.3 U1.11 | length 9.1
  Top Layer w0.4: CN1.3 82.2,-76.5 U1.11
NetCN1_4: CN1.4 U1.10 | length 9.9
  Top Layer w0.4: CN1.4 81.55,-74.61 U1.10
NetCN3_1: CN3.1 U4.13 | length 8.8
  Top Layer w0.4: U4.13 94.5,-77.2 CN3.1
NetCN3_2: CN3.2 U4.12 | length 8
  Top Layer w0.4: U4.12 93.85,-79.05 CN3.2
NetCN3_3: CN3.3 U4.11 | length 8
  Top Layer w0.4: CN3.3 93.2,-79.1 U4.11
NetCN3_4: CN3.4 U4.10 | length 8.8
  Top Layer w0.4: CN3.4 92.55,-77.21 U4.10
NetCN5_1: CN5.1 U6.13 | length 9.3
  Top Layer w0.4: U6.13 107.1,-76.15 CN5.1
NetCN5_2: CN5.2 U6.12 | length 8.6
  Top Layer w0.4: U6.12 106.45,-78 CN5.2
NetCN5_3: CN5.3 U6.11 | length 7.8
  Top Layer w0.4: U6.11 105.8,-79.85 CN5.3
NetCN5_4: CN5.4 U6.10 | length 8.5
  Top Layer w0.4: CN5.4 105.15,-78.26 U6.10
NetD1_1: D1.1 L1.1 U9.4
NetLCD1_6: LCD1.6 U8.12 | length 23.1
  Top Layer w0.5: LCD1.6 52.2,-34.85 U8.12
NetLCD1_7: LCD1.7 U8.11 | length 21.5
  Top Layer w0.4: LCD1.7 52.82,-34.2 U8.11
NetLCD1_8: LCD1.8 U8.10 | length 20
  Top Layer w0.5: LCD1.8 53.44,-33.55 U8.10
NetLED1_1: LED1.1 R11.1 | length 2.3
  Top Layer w1: R11.1 LED1.1
NetLED2_1: LED2.1 R12.1 | length 2.3
  Top Layer w1: R12.1 LED2.1
NetR1_1: R1.1 U2.9
NetR2_1: R2.1 U2.4
NetR3_2: R3.2 U2.1 U2.6 U2.7 U2.8 | length 4.9
  Top Layer w0.3: U2.1 124.9,-40.076 125.076,-39.9 R3.2
NetR4_1: R4.1 U5.9
NetR5_1: R5.1 U5.4
NetR6_2: R6.2 U5.1 U5.6 U5.7 U5.8 | length 4.9
  Top Layer w0.3: U5.1 124.9,-56.276 125.076,-56.1 R6.2
NetR7_1: R7.1 U7.9
NetR8_1: R8.1 U7.4
NetR9_2: R9.2 U7.1 U7.6 U7.7 U7.8 | length 4.9
  Top Layer w0.3: U7.1 124.9,-72.476 125.076,-72.3 R9.2
NetR14_2: R14.2 U9.1 | length 2
  Top Layer w0.5: R14.2 24.763,-49.137 26.584,-49.137 26.63,-49.184 U9.1
NJTRST: CN8.7 U3.56 | length 26.1
  Top Layer w0.3: U3.56 92.95,-42.306 93,-42.256 93,-22.3 93.6,-21.7 95.2,-21.7 95.9,-22.4 CN8.7
Pushbutton1: SW1.3 SW1.4 U3.59 | length 79.5
  Top Layer w0.3: 91,-40.6 91,-41.177 91.45,-41.627 U3.59
  Top Layer w0.5: 87.4,-33.3 87.4,-34.6 91,-38.2 91,-40.6
  Top Layer w0.8: 87.4,-33.3 87.4,-8.127 89.527,-6 101.6,-6 103.35,-7.75 SW1.4 SW1.3
Pushbutton2: SW3.3 SW3.4 U3.58 | length 82.8
  Top Layer w0.3: 91.7,-40.5 91.7,-41.3 91.95,-41.55 U3.58
  Top Layer w0.5: 88.4,-33.2 88.4,-34.702 91.7,-38.002 91.7,-40.5
  Top Layer w0.8: 88.4,-33.2 88.4,-8.4 89.9,-6.9 101.2,-6.9 115.05,-20.75 SW3.4 SW3.3
pads on no net: Designator1.0 Designator2.0 Designator3.0 LCD1.2 LCD1.3 U1.6 U1.8 U1.9 U2.12 U2.17 U2.18 U3.1 U3.9 U3.10 U3.11 U3.14 U3.15 U3.16 U3.17 U3.51 U3.52 U3.53 U3.54 U4.6 U4.8 U4.9 U5.12 U5.17 U5.18 U6.6 U6.8 U6.9 U7.12 U7.17 U7.18 U8.2 U8.6 U8.8 U8.9 U8.13 U9.6 U9.7 U10.4

## Polygon pours and split planes (outlines as drawn)
GND on Bottom Layer "GND_BOTTOM" (solid, remove dead copper, pour order 0): 0,-100 150,-100 150,0 0,0
GND on Top Layer "TOP_GND" (solid, remove dead copper, pour order 5): 0,-100 0,0 150,0 150,-100
+3V3 on Top Layer "+3V3_L01_P004" (solid, remove dead copper, pour order 4): 67.6,-69.4 67.6,-22.5 67.5,-22.4 67.5,-22 111.6,-22 111.6,-69.4
+5V on Top Layer "+5V_L01_P003" (solid, pour order 3): 113.9,-83.503 113.9,-69.4 67.6,-69.4 67.6,-24.5 23.3,-24.5 23.3,-83.5 23.2,-83.6
+24V on Top Layer "TOP_+24V" (solid, remove dead copper, pour order 2): 26.3,-66 26.3,-83.5 118.3,-83.5 118.3,-31.5 150,-31.5 150,-100 0,-100 0,-66

## Other copper
Top Layer:
  rectangle net GND: 143.8,-99.694 149.694,-93.7
  rectangle net GND: 0.306,-99.694 6.2,-93.7
  rectangle net GND: 119.8,-13.05 123,-11.35
  region net GND: 130.2,-11.35 127,-11.35 127,-13.05 130.2,-13.05
  region net GND: 130.2,-24.35 127,-24.35 127,-26.05 130.2,-26.05
  rectangle net GND: 119.8,-26.05 123,-24.35
  rectangle net GND: 90.5,-10.7 95.1,-8
  region net GND: 70.5,-51.7 70.5,-48.5 68.8,-48.5 68.8,-51.7
  rectangle net GND: 93.5,-26.1 95.1,-22.4
  rectangle net GND: 82.9,-50 86.1,-48.8
  region net GND: 81.8,-45.8 81.8,-43.7 80.4,-43.7 80.4,-45.8
  rectangle net GND: 83.357,-41.278 87.414,-39.461
  rectangle net GND: 79.3,-67.2 80.5,-65.6
  rectangle net GND: 90.3,-67.2 91.5,-65.6
  rectangle net GND: 102.9,-67.1 104.1,-65.5
  rectangle net GND: 109.1,-71.1 110.7,-67.7
  rectangle net GND: 85.5,-71.2 87.1,-67.8
  rectangle net GND: 121.3,-37.3 122.9,-35.3
  rectangle net GND: 121.3,-53.5 122.9,-51.5
  rectangle net GND: 121.3,-69.7 122.9,-67.7
  rectangle net GND: 130.2,-40.6 132.1,-39.2
  rectangle net GND: 130.2,-56.8 132.1,-55.4
  rectangle net GND: 130.2,-73 132.1,-71.6
  region net GND: 65.9,-36.8 65.9,-39.1 69.3,-39.1 69.3,-36.8
  rectangle net GND: 96.5,-71.2 98.1,-67.8
  region net GND: 68.8,-41.3 68.8,-44.5 70.5,-44.5 70.5,-41.3
  rectangle net GND: 68.4,-32.5 71.5,-31
  rectangle net GND: 46.4,-47.9 48,-45.6
  rectangle net GND: 70.3,-57.3 71.9,-55
  rectangle net GND: 49.3,-64.3 53.3,-58.6
  rectangle net GND: 30,-44.6 31.7,-42
  region net NetD1_1: 35.5,-52.875 35.5,-47.275 30,-47.275 30,-52.875
  region net +24V: 125.3,-40.3 125.7,-40.3 125.7,-43.9 124.2,-43.9 124.2,-42.5 125.3,-42.5
  region net GND: 88.5,-57.5 81,-57.5 81,-58.7 78.9,-58.7 78.9,-54.8 88.5,-54.8
  region net NetR3_2: 126.5,-39.1 126.5,-40.2 127.4,-40.2 127.4,-40.1 128.2,-40.1 128.2,-40.6 129.4,-40.6 129.4,-39.1
  region net NetR6_2: 126.5,-55.3 126.5,-56.4 127.4,-56.4 127.4,-56.3 128.2,-56.3 128.2,-56.8 129.4,-56.8 129.4,-55.3
  region net NetR9_2: 126.5,-71.5 126.5,-72.6 127.4,-72.6 127.4,-72.5 128.2,-72.5 128.2,-73 129.4,-73 129.4,-71.5
  region net +24V: 125.7,-71.9 125.3,-71.9 125.3,-70.3 123.9,-70.3 123.9,-68.9 125.7,-68.9
  region net +24V: 125.7,-55.7 125.3,-55.7 125.3,-54.1 123.9,-54.1 123.9,-52.7 125.7,-52.7
  region net +24V: 125.7,-39.5 125.3,-39.5 125.3,-37.9 123.9,-37.9 123.9,-36.5 125.7,-36.5
  region net +24V: 125.3,-72.7 125.7,-72.7 125.7,-76.3 124.2,-76.3 124.2,-74.9 125.3,-74.9
  region net +24V: 125.3,-56.5 125.7,-56.5 125.7,-60.1 124.2,-60.1 124.2,-58.7 125.3,-58.7
  region net GND: 124.5,-40.9 124.5,-41.3 123.8,-41.3 123.8,-43.9 122.2,-43.9 122.2,-40.9
  region net GND: 124.5,-57.1 124.5,-57.5 123.8,-57.5 123.8,-60.1 122.2,-60.1 122.2,-57.1
  region net GND: 124.5,-73.3 124.5,-73.7 123.8,-73.7 123.8,-76.3 122.2,-76.3 122.2,-73.3
  region net NetC3_1: 130.2,-38.9 130.2,-36.8 133.8,-36.8 133.8,-39.4 132.3,-39.4 132.3,-38.9
  region net NetC5_1: 130.2,-40.9 130.2,-43 133.8,-43 133.8,-40.4 132.3,-40.4 132.3,-40.9
  region net NetR2_1: 126.5,-40.9 129.4,-40.9 129.4,-43 127.6,-43 127.6,-41.3 126.5,-41.3
  region net NetR1_1: 126.5,-38.9 129.4,-38.9 129.4,-36.8 127.6,-36.8 127.6,-38.5 126.5,-38.5
  region net NetR5_1: 126.5,-57.1 129.4,-57.1 129.4,-59.2 127.6,-59.2 127.6,-57.5 126.5,-57.5
  region net NetR4_1: 126.5,-55.1 129.4,-55.1 129.4,-53 127.6,-53 127.6,-54.7 126.5,-54.7
  region net NetC13_1: 130.2,-57.1 130.2,-59.2 133.8,-59.2 133.8,-56.6 132.3,-56.6 132.3,-57.1
  region net NetC9_1: 130.2,-55.1 130.2,-53 133.8,-53 133.8,-55.6 132.3,-55.6 132.3,-55.1
  region net NetC13_2: 125.9,-56.5 126.3,-56.5 126.3,-57.7 127.2,-57.7 127.2,-59.5 134.2,-59.5 134.2,-56.6 143.4,-56.6 143.4,-61.6 125.9,-61.6
  region net NetC5_2: 125.9,-40.3 126.3,-40.3 126.3,-41.5 127.2,-41.5 127.2,-43.3 134.2,-43.3 134.2,-40.4 143.4,-40.4 143.4,-45.4 125.9,-45.4
  region net NetC3_2: 125.9,-39.5 126.3,-39.5 126.3,-38.3 127.2,-38.3 127.2,-36.5 134.2,-36.5 134.2,-39.4 143.4,-39.4 143.4,-34.4 125.9,-34.4
  region net NetC9_2: 125.9,-55.7 126.3,-55.7 126.3,-54.5 127.2,-54.5 127.2,-52.7 134.2,-52.7 134.2,-55.6 143.4,-55.6 143.4,-50.6 125.9,-50.6
  region net NetC15_2: 125.9,-71.9 126.3,-71.9 126.3,-70.7 127.2,-70.7 127.2,-68.9 134.2,-68.9 134.2,-71.8 143.4,-71.8 143.4,-66.8 125.9,-66.8
  region net NetC17_2: 125.9,-72.7 126.3,-72.7 126.3,-73.9 127.2,-73.9 127.2,-75.7 134.2,-75.7 134.2,-72.8 143.4,-72.8 143.4,-77.8 125.9,-77.8
  region net NetC15_1: 130.2,-71.3 130.2,-69.2 133.8,-69.2 133.8,-71.8 132.3,-71.8 132.3,-71.3
  region net NetC17_1: 130.2,-73.3 130.2,-75.4 133.8,-75.4 133.8,-72.8 132.3,-72.8 132.3,-73.3
  region net NetR7_1: 126.5,-71.3 129.4,-71.3 129.4,-69.2 127.6,-69.2 127.6,-70.9 126.5,-70.9
  region net NetR8_1: 126.5,-73.3 129.4,-73.3 129.4,-75.4 127.6,-75.4 127.6,-73.7 126.5,-73.7
  region net GND: 31.4,-53 31.4,-54.8 25.1,-54.8 25.1,-52.7 29.3,-52.7 29.3,-53
  region net GND: 66.9,-54.4 66.9,-55.1 65.6,-55.1 65.6,-57 60.1,-57 60.1,-54.4
  region net +24V: 29,-52.175 29,-50.175 29.6,-50.175 29.6,-48.375 27.5,-48.375 27.5,-50.675 22.9,-50.675 22.9,-54.875 20.9,-54.875 20.9,-72.8 24.4,-72.8 24.4,-52.275 24.5,-52.175

## Silkscreen, mask and mechanical layers (free items; w line width, h text height)
Top Overlay:
  lines w0.2: 126.9,-41.5 127.2,-41.5 ; 127.6,-41.5 127.7,-41.5 ; 131.4,-73.1 131.8,-73.5 131.8,-78.4 ; 131.4,-56.9 131.8,-57.3 131.8,-62.2 ; 131.8,-46 131.8,-41.1 131.4,-40.7 ; 131.4,-40.7 131.4,-40.7
Board Outline:
  the board outline again, w0.5

## Text inside footprints (layer, text, board x,y; h text height)
C23: Top Overlay "+" at 80.916,-52.106 h1.52 r270
C29: Top Overlay "+" at 23.194,-63.491 h1.52 r180
C30: Top Overlay "+" at 23.194,-56.891 h1.52 r180